# EAGLE board ArduinoMegaShield3 (EAGLE 8.4.1)
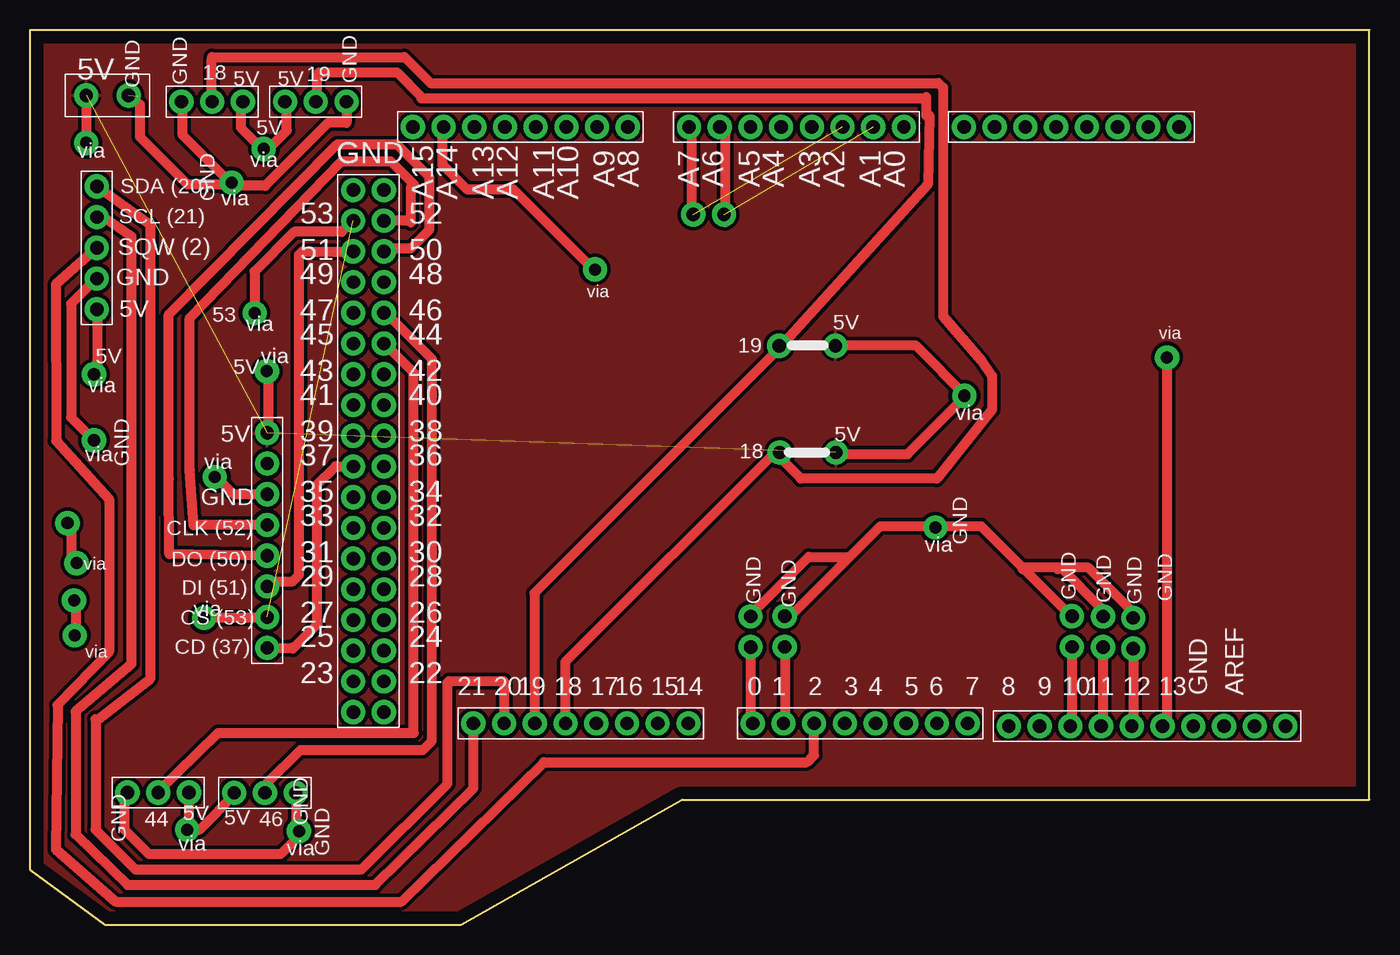
[diagram p0: board, top side]
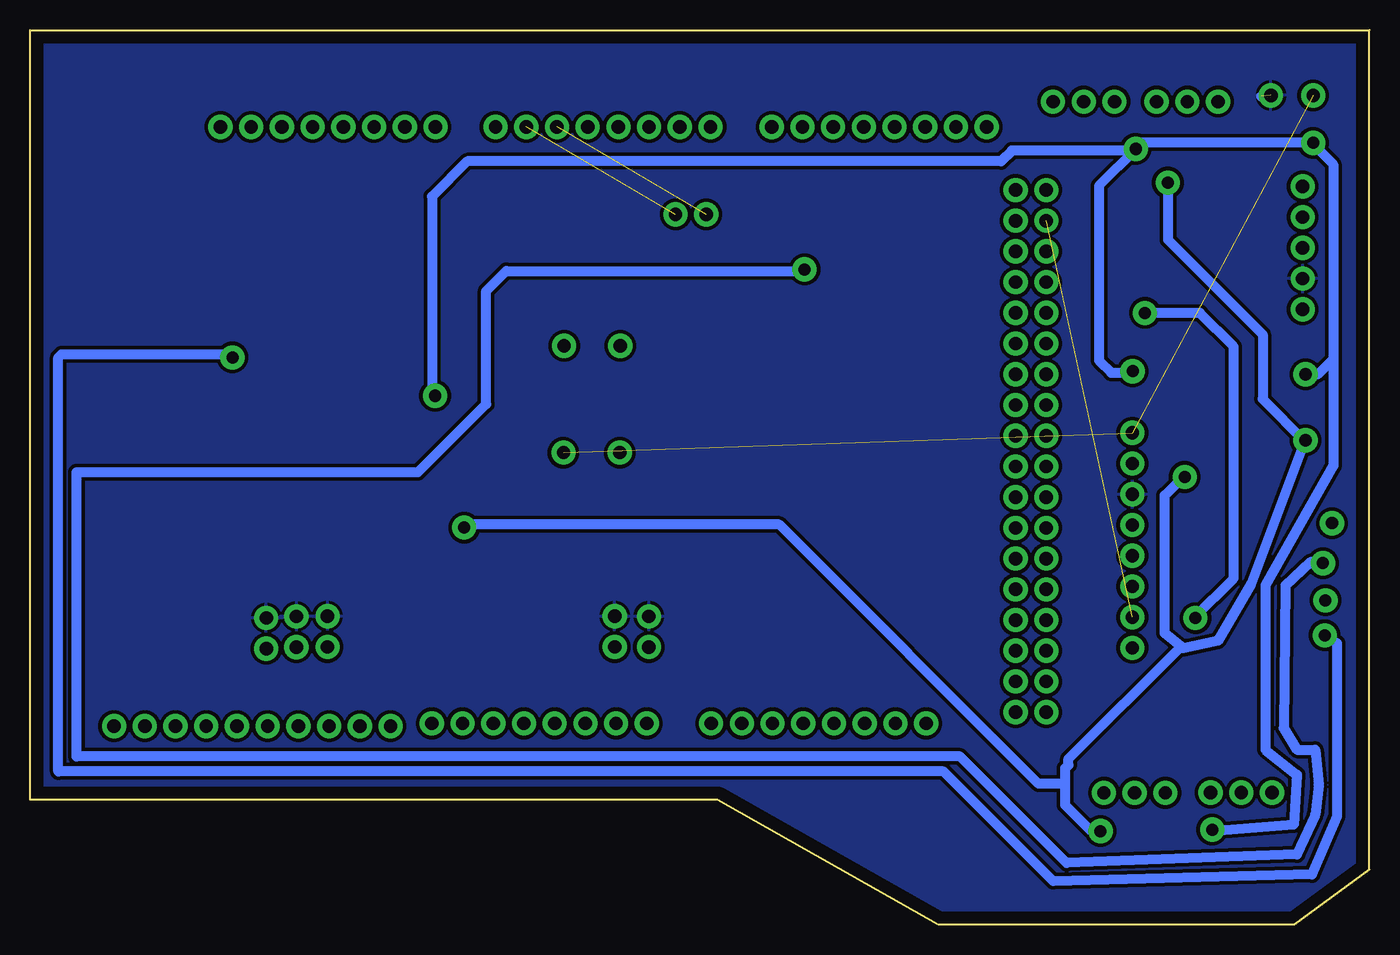
[diagram p1: board, bottom side, seen from below]

Size 110.72 x 73.96 mm. Coordinates in mm from the lower left corner, seen from the top.
Outline: 110.72,10.31 110.72,73.96 0,73.96 0,4.53 6.18,0 35.64,0 53.91,10.31 110.72,10.31
Copper layers (1*16): Top 0.035mm / dielectric 1.5mm / Bottom 0.035mm
Design rules "default": minimum track width 6mil, minimum drill 0.35mm, track to track 6mil, track to pad 6mil, pad to pad 6mil, via to via 6mil, smd to smd 6mil, copper to edge 40mil, drill to drill 6mil, minimum pad ring 10mil, minimum via ring 8mil, stop-mask expansion 4mil, vias tented up to drill 0mil, thermal gap 10mil

## Footprints (pad centres in the part's own frame; a part is rotated, then mirrored left to right if it is on the bottom)
8PINHEADER2.54MM = drill 1.1 pad 2: P$1 -8.89,0; P$2 -6.35,0; P$3 -3.81,0; P$4 -1.27,0; P$5 1.27,0; P$6 3.81,0; P$7 6.35,0; P$8 8.89,0
10PINHEADER2.54MM = drill 1.1 pad 2: P$1 1.27,0; P$2 3.81,0; P$3 6.35,0; P$4 8.89,0; P$5 11.43,0; P$6 -1.27,0; P$7 -3.81,0; P$8 -6.35,0; P$9 -8.89,0; P$10 -11.43,0
18X2HEADER2.54MM = drill 1.1 pad 2: P$1 -21.59,1.27; P$2 -19.05,1.27; P$3 -16.51,1.27; P$4 -13.97,1.27; P$5 -11.43,1.27; P$6 -8.89,1.27; P$7 -6.35,1.27; P$8 -3.81,1.27; P$9 -1.27,1.27; P$10 1.27,1.27; P$11 3.81,1.27; P$12 6.35,1.27; P$13 8.89,1.27; P$14 11.43,1.27; P$15 13.97,1.27; P$16 16.51,1.27; P$17 19.05,1.27; P$18 21.59,1.27; P$19 21.59,-1.27; P$20 19.05,-1.27; P$21 16.51,-1.27; P$22 13.97,-1.27; P$23 11.43,-1.27; P$24 8.89,-1.27; P$25 6.35,-1.27; P$26 3.81,-1.27; P$27 1.27,-1.27; P$28 -1.27,-1.27; P$29 -3.81,-1.27; P$30 -6.35,-1.27; P$31 -8.89,-1.27; P$32 -11.43,-1.27; P$33 -13.97,-1.27; P$34 -16.51,-1.27; P$35 -19.05,-1.27; P$36 -21.59,-1.27
5PINHEADER2.54MM = drill 1.1 pad 2: 5V 5.08,0; GND 2.54,0; P$1 -5.08,0; P$2 -2.54,0; P$3 0,0
SERVOS = drill 1.1 pad 2: 5V 2.54,0; GND 5.08,0; P$1 0,0
SDCARDMODULE = drill 1.1 pad 2: 5V 8.89,0; GND 3.81,0; P$1 -8.89,0; P$2 -6.35,0; P$3 -3.81,0; P$4 -1.27,0; P$5 1.27,0; P$7 6.35,0
HALLEFFECTSENSORS = drill 1.1 pad 2: GND 5.08,0; P$1 0,0; P$2 2.54,0
2PIN2.54MM = drill 1.1 pad 2: GND 2.54,0; P$1 0,0
2PIN11MM = drill 1.1 pad 2: 5V 4.65,0; P$1 0,0
BUTTONS = drill 1.1 pad 2: P$1 0,0; P$2 2.54,0
2PINTERMINAL3.5MM = drill 1.1 pad 2: 5V 0,0; GND 3.5,0

## Placement (x,y rotation side)
U$1  8PINHEADER2.54MM  [8PINHEADER2.54MM]  68.62,16.63 0 top
U$2  8PINHEADER2.54MM  [8PINHEADER2.54MM]  45.53,16.63 0 top
U$3  8PINHEADER2.54MM  [8PINHEADER2.54MM]  40.52,65.96 0 top
U$4  8PINHEADER2.54MM  [8PINHEADER2.54MM]  63.36,65.96 0 top
U$5  8PINHEADER2.54MM  [8PINHEADER2.54MM]  86.1,65.96 0 top
U$6  10PINHEADER2.54MM  [10PINHEADER2.54MM]  92.35,16.41 180 top
U$7  18X2HEADER2.54MM  [18X2HEADER2.54MM]  27.98,39.15 90 top
U$8  5PINHEADER2.54MM  [5PINHEADER2.54MM]  5.51,55.96 270 top
U$9  SERVOS  [SERVOS]  26.15,68.05 180 top
U$10  SDCARDMODULE  [SDCARDMODULE]  19.59,31.77 90 top
U$11  SERVOS  [SERVOS]  17.58,68.05 180 top
U$12  HALLEFFECTSENSORS  [HALLEFFECTSENSORS]  8.05,10.92 0 top
U$13  HALLEFFECTSENSORS  [HALLEFFECTSENSORS]  16.86,10.89 0 top
U$14  2PIN2.54MM  [2PIN2.54MM]  62.39,22.95 90 top
U$15  2PIN2.54MM  [2PIN2.54MM]  59.56,22.95 90 top
U$17  2PIN2.54MM  [2PIN2.54MM]  91.2,22.82 90 top
U$18  2PIN2.54MM  [2PIN2.54MM]  88.7,22.94 90 top
U$19  2PIN2.54MM  [2PIN2.54MM]  86.14,22.96 90 top
U$20  2PIN11MM  [2PIN11MM]  61.98,39.03 0 top
U$21  2PIN11MM  [2PIN11MM]  61.92,47.86 0 top
U$22  BUTTONS  [BUTTONS]  57.36,58.72 180 top
U$23  2PINTERMINAL3.5MM  [2PINTERMINAL3.5MM]  4.63,68.56 0 top

## Library data of the parts
U$1-U$15 U$17-U$23 = ArduinoMegaShield2

## Nets
GND: U$8.GND U$10.GND U$14.GND U$15.GND U$17.GND U$18.GND U$19.GND U$23.GND
N$1: U$20.P$1
N$4: U$4.P$7 U$22.P$1
N$5: U$4.P$6 U$22.P$2
N$6: U$2.P$2 U$8.P$1
N$7: U$2.P$1 U$8.P$2
N$8: U$1.P$3 U$8.P$3
N$9: U$21.P$1
N$12: U$7.P$20 U$10.P$5
N$13: U$7.P$21 U$10.P$4
N$14: U$7.P$16 U$10.P$3
N$15: U$7.P$17 U$10.P$2
N$16: U$7.P$9 U$10.P$1
N$17: U$7.P$23
N$18: U$7.P$24
N$19: U$1.P$2 U$14.P$1
N$20: U$1.P$1 U$15.P$1
N$22: U$6.P$1 U$17.P$1
N$23: U$6.P$2 U$18.P$1
N$24: U$6.P$3 U$19.P$1
TOP: U$10.5V U$20.5V U$21.5V U$23.5V

## Tracks (layer width: path | path; a pad name or v marks a point on that pad's centre or on a via)
GND  (1 unrouted)
  Bottom 0.813: 8.92,68.48 8.93,68.49
  pour Bottom (isolate 0.305): 0,73.96 0,4.53 6.18,0 35.64,0 53.65,10.31 110.72,10.31 110.72,73.96
N$2  (via drill 1 pad 2)
  Bottom 0.813: v19.31,64.14 22.35,61.1 22.35,46.64 21.33,45.63 19.56,45.63
N$3  (via drill 1 pad 2)
  other vias: 16.65,61.35
N$4  (1 unrouted)
N$5  (1 unrouted)
N$6
  Top 0.813: U$8.P$1 9.91,57.87 9.91,20.28 5.64,16.98 5.4,16.98 5.4,7.84 8.69,4.55 27.39,4.55 34.49,11.65 34.49,20.02 34.62,20.15 39.17,20.15 39.18,20.14 U$2.P$2
N$7
  Top 0.813: U$8.P$2 6.08,58.5 8.36,56.91 8.36,21.53 3.75,17.61 3.75,7.46 8.05,3.28 28.52,3.28 36.64,11.27 U$2.P$1
N$8
  Top 0.813: U$8.P$3 2.11,52.94 2.14,40.02 6.52,35.21 6.52,22.56 2.27,18.16 2.11,6.2 7.05,1.89 30.69,1.89 42.48,13.43 64.21,13.43 64.81,14.03 U$1.P$3
N$10  (via drill 1 pad 2)
  other vias: 4.64,64.65
N$11
  Top 0.813: 17.41,68.2 17.41,65.91 19.44,63.88 21.21,65.66 21.21,68.2
N$12
  Top 0.813: U$10.P$5 13.5,33.03 13.19,37.57 13.19,50.17 25.76,63.12 29.8,63.12 31.71,61.22 31.45,60.97 31.45,58.05 31.3,58.2 U$7.P$20
N$13
  Top 0.813: U$10.P$4 11.5,30.64 11.46,36.87 11.46,50.45 25.38,64.52 30.31,64.52 32.97,61.86 32.97,57.42 31.45,55.9 29.48,55.9 U$7.P$21
N$14
  Top 0.813: U$10.P$3 20.01,28.39 21.71,28.39 22.22,28.89 22.22,55.39 22.49,55.66 U$7.P$16
N$15  (1 unrouted)
N$16
  Top 0.813: U$10.P$1 21.64,22.88 21.71,22.81 23.74,24.83 23.74,36.37 25.25,37.88 U$7.P$9
N$19
  Top 0.813: U$14.P$1 62.39,16.75 U$1.P$2
N$20
  Top 0.813: U$15.P$1 59.56,16.81 U$1.P$1
N$21
  Top 0.813: 55.01,58.38 54.72,58.67 54.72,66.1
N$22
  Top 0.813: U$17.P$1 91.2,16.53 U$6.P$1
N$23
  Top 0.813: U$18.P$1 88.7,16.57 U$6.P$2
N$24
  Top 0.813: U$19.P$1 86.14,16.55 U$6.P$3
N$27
  Top 0.813: 74.33,66.93 74.21,61.19 61.94,47.66
N$28  (via drill 1 pad 2)
  other vias: 3.08,33.19
N$29
  Top 0.813: 62.19,47.91 41.7,27.42 41.7,16.09
N$30
  Top 0.813: 91.28,25.34 91.28,25.73 87.49,29.53 85.08,29.53 84.96,29.4
N$32
  Top 0.813: 8.43,68.45 9.06,67.82 9.06,65.15 12.99,61.22 16.65,61.22 | 26.27,68.07 26.14,67.94 26.14,66.29 24.63,66.29 19.44,61.1 16.78,61.1 16.65,61.22 | 16.65,61.22 12.61,65.27 12.61,68.2
N$33
  Top 0.813: 10.46,10.89 15.53,15.84 31.71,15.84 31.71,45.63 29.18,48.16
N$34
  Top 0.813: 19.56,10.76 19.56,11.66 22.35,14.44 32.46,14.44 33.22,15.2 33.22,46.78 29.3,50.7
N$35  (via drill 1 pad 2)
  other vias: 5.27,45.5
N$36  (via drill 1 pad 2)
  other vias: 5.27,40.05
N$37
  Top 0.813: 5.52,50.7 5.52,45.37 5.4,45.25
N$38
  Top 0.813: 5.52,53.11 5.15,53.11 3.37,51.33 3.37,41.95 5.4,39.92
N$39
  Top 0.813: 4.76,68.58 4.64,68.45 4.64,64.26
N$40
  Top 0.813: 19.69,25.6 19.44,25.34 14.25,25.34
N$41
  Top 0.813: 26.77,58.31 25.76,57.29 21.84,57.29 18.55,54 18.55,50.19
N$42
  Top 0.813: 62.69,25.34 70.3,32.95 78.61,32.95 86.22,25.34
N$43
  Top 0.813: 59.53,25.6 64.35,30.42 67.75,30.42
N$49
  Top 0.813: 88.62,25.85 88.62,26.11 85.21,29.53 82.17,29.53 82.05,29.4
N$50  (via drill 1 pad 2)
  other vias: 14.38,25.34
N$51  (via drill 1 pad 2)
  other vias: 18.55,50.57
N$52  (via drill 1 pad 2)
  Bottom 0.813: v22.22,7.72 22.97,7.72 25.13,9.88 25.13,11.65 | 25.13,11.65 25.13,12.92 24.88,13.17 24.88,13.7 15.64,22.94 | 25.13,11.65 27.36,11.65 48.78,33.08 74.96,33.08 75.22,32.82
N$53
  Bottom 0.813: 4.64,64.52 2.99,62.87 2.99,46.77 | 2.99,46.77 4.26,45.5 5.52,45.5 | 2.99,46.77 2.96,37.96 8.58,28.06 8.58,14.45 5.97,12.39 6.25,8.26 12.97,7.71
N$54
  Top 0.813: 21.97,10.89 21.97,8.35 22.6,7.72 20.7,5.82 9.83,5.82 7.8,7.85 7.8,10.51 8.18,10.89
N$55
  Top 0.813: 13.11,11.02 13.11,7.85 13.99,7.85 17.03,10.89
N$56  (via drill 1 pad 2)
  other vias: 74.84,32.82
N$57
  Top 0.813: 89,25.09 88.37,25.72 88.37,26.23
N$58  (via drill 1 pad 2)
  other vias: 77.24,43.73
N$59
  Top 0.813: 66.87,38.91 72.55,38.91 77.37,43.73
N$60
  Top 0.813: 66.49,47.91 73.18,47.91 77.49,43.6
N$61  (via drill 1 pad 2)
  other vias: 19.56,45.76
N$62  (via drill 1 pad 2)
  other vias: 15.26,37.01
N$63
  Top 0.813: 15.26,37.13 16.78,35.61 19.56,35.61
N$64
  Top 0.813: 19.69,45.88 19.69,40.43
N$65
  Bottom 0.813: 14.5,25.34 11.21,28.63 11.21,47.78 14,50.57 18.68,50.57
N$66
  Bottom 0.813: 4.89,64.65 19.06,64.65 19.56,64.14
N$67
  Top 0.813: 23.86,70.22 23.74,70.1 23.74,67.94
N$68
  Bottom 0.813: 19.56,64.01 29.55,64.01 30.44,63.12 74.58,63.12 77.49,60.21 77.49,43.73 77.24,43.47
N$69
  Bottom 0.813: 16.65,61.22 16.65,56.64 8.81,48.8 8.81,43.47 5.27,39.92
N$70
  Bottom 0.813: 5.4,39.8 9.76,28.19 12.51,23.46 15.38,22.85 16.91,24.08 16.91,35.49 15.26,37.13
N$71
  Top 0.813: 15.01,68.07 15.01,71.62
N$72
  Top 0.813: 23.86,70.48 30.31,70.48 32.34,68.45 32.34,68.32 73.95,68.32 74.08,68.45
N$73
  Top 0.813: 74.08,68.32 74.08,66.93 74.21,66.8
N$74
  Top 0.813: 15.01,71.74 30.94,71.74 33.1,69.59 75.09,69.59 75.47,69.21 75.47,50.3 78.63,46.64 79.52,45.38 79.52,42.59 74.95,36.88 63.71,36.88 61.81,38.78 61.81,39.29 44.23,21.71 44.23,16.09
N$75  (via drill 1 pad 2)
  other vias: 3.83,29.89
N$76  (via drill 1 pad 2)
  other vias: 3.62,26.81
N$77  (via drill 1 pad 2)
  other vias: 3.69,23.92
N$78
  Top 0.813: 3.37,33.28 3.37,30.26 3.92,29.71
N$79  (via drill 1 pad 2)
  Bottom 0.813: v12.99,7.85 12.73,7.6
N$80
  Top 0.813: 3.78,26.82 3.78,23.66
N$81
  Bottom 0.813: 3.64,29.98 4.87,29.98 6.93,28.06 7.07,16.24 5.97,14.45 4.47,14.45 4.19,11.56 4.47,9.09 5.98,5.79 25.03,5.1 33.83,13.9 106.88,13.9 106.88,37.41 78.65,37.41 73.02,43.04 73.02,52.39 71.37,54.04 46.56,54.04
N$82  (via drill 1 pad 2)
  other vias: 46.69,54.18
N$83
  Top 0.813: 46.83,53.9 39.96,60.77 36.14,60.77 34.08,62.83 34.08,65.86
N$84
  Bottom 0.813: 3.64,23.94 2.68,23.25 2.68,8.95 4.74,4.14 26.13,3.59 35.2,12.66 108.39,12.66 108.39,46.89 108.12,47.17 94.27,47.17 93.72,46.62
N$85  (via drill 1 pad 2)
  Top 0.813: v94,46.89 94,16.65 93.58,16.24
N$86
  Top 0.813: 57.19,66.25 57.48,65.96 57.48,58.96 57.48,58.82 57.48,58.09
TOP  (2 unrouted)
  pour Top (isolate 0.305): 0,73.96 0,4.53 6.18,0 35.52,0 53.91,10.31 110.72,10.31 110.72,73.96

## Text on the board
tPlace: 5V | GND | 18 | 19 | GND | GND | 5V | 5V | 5V | via | via | GND | A9 | A8 | A7 | A6 | A5 | A4 | A3 | A2 | A1 | A0 | SDA (20) | GND | A15 | A14 | A13 | A12 | A11 | A10 | via | SCL (21) | 53 | 52 | SQW (2) | 51 | 50 | GND | 49 | 48 | via | 53 | 5V | 47 | 46 | via | 5V | 45 | 44 | via | 19 | 5V | 5V | via | 43 | 42 | via | 41 | 40 | via | 5V | 39 | 38 | 5V | 18 | via | GND | via | 37 | 36 | GND | 35 | 34 | 33 | 32 | CLK (52) | via | GND | DO (50) | 31 | 30 | via | 29 | 28 | DI (51) | GND | GND | GND | GND | GND | via | GND | CS (53) | 27 | 26 | 25 | 24 | via | CD (37) | 23 | 22 | 21 | 20 | 19 | 18 | 17 | 16 | 15 | 14 | 0 | 1 | 2 | 3 | 4 | 5 | 6 | 7 | 8 | 9 | 10 | 11 | 12 | 13 | GND | AREF | 5V | 44 | 5V | 46 | GND | GND | via | via | GND